# Altium PCB shoot sensor.PcbDoc
Units mm, origin at the board's own origin, x right, y up, seen from the top; angles counter-clockwise.
Board outline 35.43 x 7.88 mm, 2 copper layers (Top Layer, Bottom Layer); 4 components, 5 nets, 13 pads, 0 vias.
Unrouted connection lines stored in the file: 2.
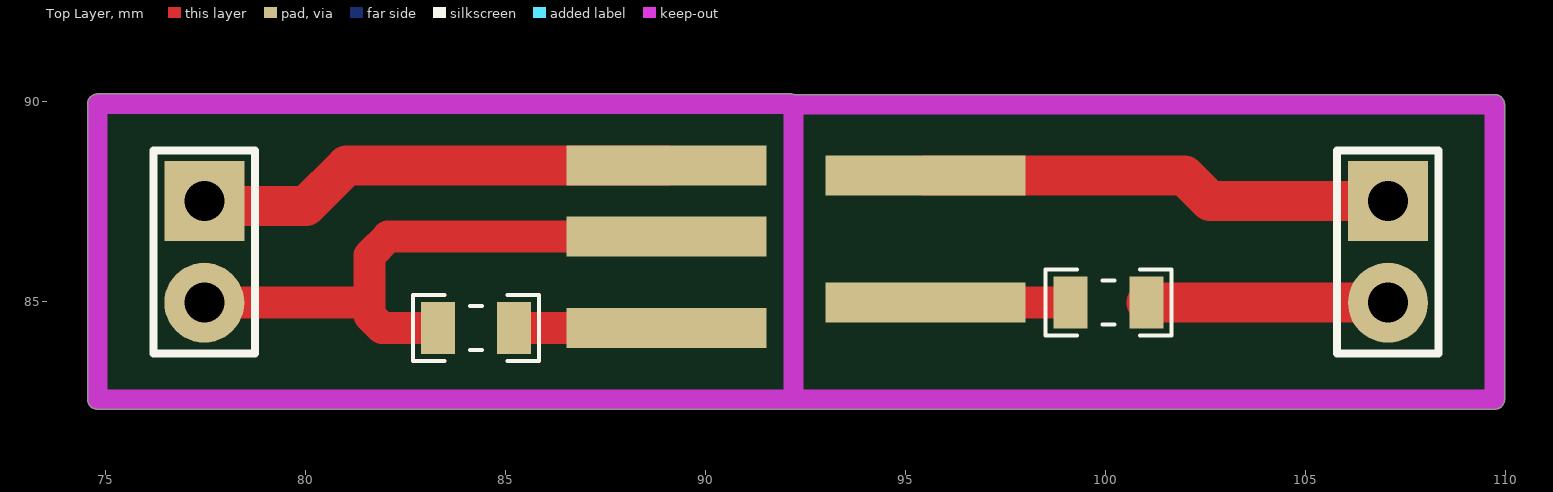
[diagram p0: Top Layer view]
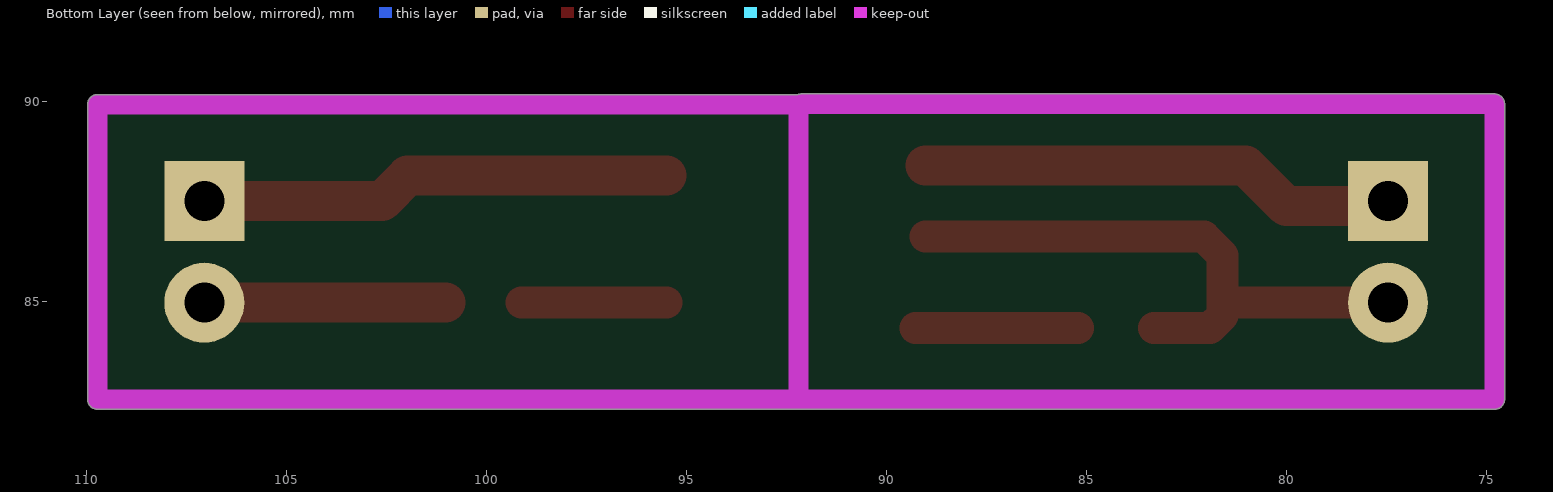
[diagram p1: Bottom Layer view, seen from below]

## Layer stack, top to bottom
Top Solder: solder mask 0.0102, Solder Resist, Dk 3.5
Top Layer: signal copper 0.0356
Dielectric 1: dielectric 0.32, FR-4, Dk 4.8
Bottom Layer: signal copper 0.0356
Bottom Solder: solder mask 0.0102, Solder Resist, Dk 3.5

## Board outline
74.803,82.3 cw(c74.803,82.55) 74.553,82.55 74.553,89.932 cw(c74.803,89.932) 74.803,90.182 92.134,90.182 cw(c92.134,89.932) 92.222,90.166 109.728,90.166 cw(c109.728,89.916) 109.978,89.916 109.978,82.55 cw(c109.728,82.55) 109.728,82.3 92.202,82.3

## Design rules (kind name [scope] priority, off if disabled: settings)
Clearance [All] p1: gap=0.254 ignorepadtopadclearanceinfootprint=FALSE except(0: Arc-Hole Track-Hole SMDPad-Hole THPad-Hole Via-Hole Fill-Hole Poly-Hole Region-Hole Text-Hole)
PolygonConnect [All] p1: connectstyle=Relief reliefconductorwidth=0.254 reliefentries=4 polygonreliefangle="90 Angle" airgapwidth=0.254
RoutingVias [All] p1: holewidth=0.711 width=1.27 viastyle="Through Hole" minholewidth=0.711 minwidth=1.27 maxholewidth=0.711 maxwidth=1.27
SolderMaskExpansion [All] p1: expansion=0.102 istentingtop=FALSE
Width [All] p1: maxlimit=3 minlimit=0.254 preferedwidth=1
30 further rules are at their usual default settings.

## Components (designator, comment, footprint, x,y, rotation, side; value= is the part's Value field where it differs from the comment)
? "Comment" RES0805 100.076,84.963 r0 top
? "Comment" RES0805 84.262,84.328 r0 top
? "Comment" HDR1X2 77.47,87.503 r270 top
? "Comment" HDR1X2 107.061,87.503 r270 top

## Footprints (in the part's own frame and the unit in brackets; to place one, negate y for a bottom-side part, rotate by r counter-clockwise, add the part's x,y. Pads: shape width x height; smd on the part's side, far side on the other; paste and mask are expansions set on the pad)
HDR1X2 [mm] "Connector; Header; 2 Position"
  rect 2x2 hole 1: 1(0,0)
  round 2 hole 1: 2(2.54,0)
  silkscreen extent -1.27,-1.27 3.81,1.27
RES0805 [mm] "Chip Resistor, 2-Leads, Body 2/00x1/25mm, IPC Medium Density DESIGNER:ABBAS BASEREH"
  rect 0.85x1.3 smd: 1(-0.95,0) 2(0.95,0)
  silkscreen extent -1.58,-0.82 1.58,0.82, body extent -1.02,-0.65 1.02,0.65, height 0.5

## Free pads (board coordinates)
  rect 5x1 smd: 3(89.027,84.328) 3(89.027,86.614) 3(89.027,88.392) 3(95.504,84.963) 3(95.504,88.138)

## Nets (pads, with @x,y where several pads share a name; then routed paths per layer and width w, separated by ;. In a path a pad name is that pad's centre, name@x,y a point inside that pad or via, vN(x,y) a via of type N, cw(c..) or ccw(c..) an arc to the next point about the centre after c; other vN are vias at no path point)
GND: ?.1@99.126,84.963 ?.2@85.212,84.328 pad.3@89.027,84.328 pad.3@95.504,84.963 | length 7.7
  Top Layer w0.8: ?.2@85.212,84.328 89.027,84.328 pad.3@89.281,84.328 ; pad.3@95.504,84.963 ?.1@99.126,84.963
OUT: ?.1@83.312,84.328 ?.2@77.47,84.963 pad.3@89.027,86.614 | length 15.1
  Top Layer w0.8: ?.2@77.47,84.963 81.6,84.963 ; ?.1@83.312,84.328 81.915,84.328 81.6,84.643 81.6,84.963 ; pad.3@89.027,86.614 82.069,86.614 81.6,86.145 81.6,84.963
reciever: 
transmitter: ?.2@101.026,84.963 ?.2@107.061,84.963 | length 6
  Top Layer w1: ?.2@101.026,84.963 ?.2@107.061,84.963
VCC: ?.1@77.47,87.503 ?.1@107.061,87.503 pad.3@89.027,88.392 pad.3@95.504,88.138 | length 23.9
  Top Layer w1: ?.1@77.47,87.503 77.597,87.376 80.01,87.376 81.026,88.392 pad.3@89.027,88.392 ; pad.3@95.504,88.138 101.981,88.138 102.616,87.503 ?.1@107.061,87.503

## Keep-outs
Keep-Out Layer:
  lines w0.5: 92.134,89.932 74.803,89.932 74.803,82.55 92.202,82.55 ; 92.202,82.55 109.728,82.55 109.728,89.916 92.202,89.916 92.202,82.55